# EAGLE board SandwichBoard (EAGLE 5.06)
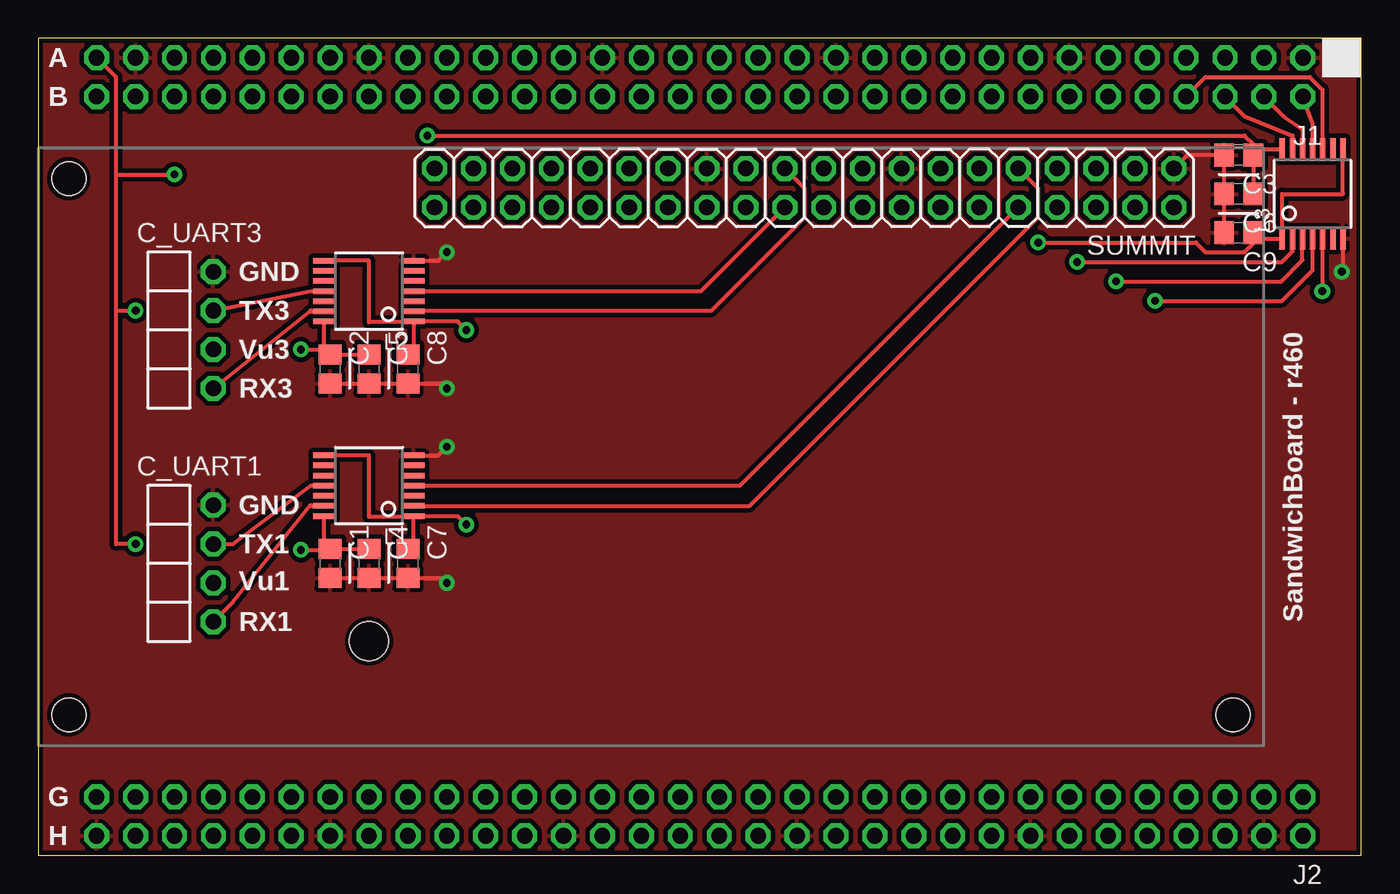
[diagram p0: board, top side]
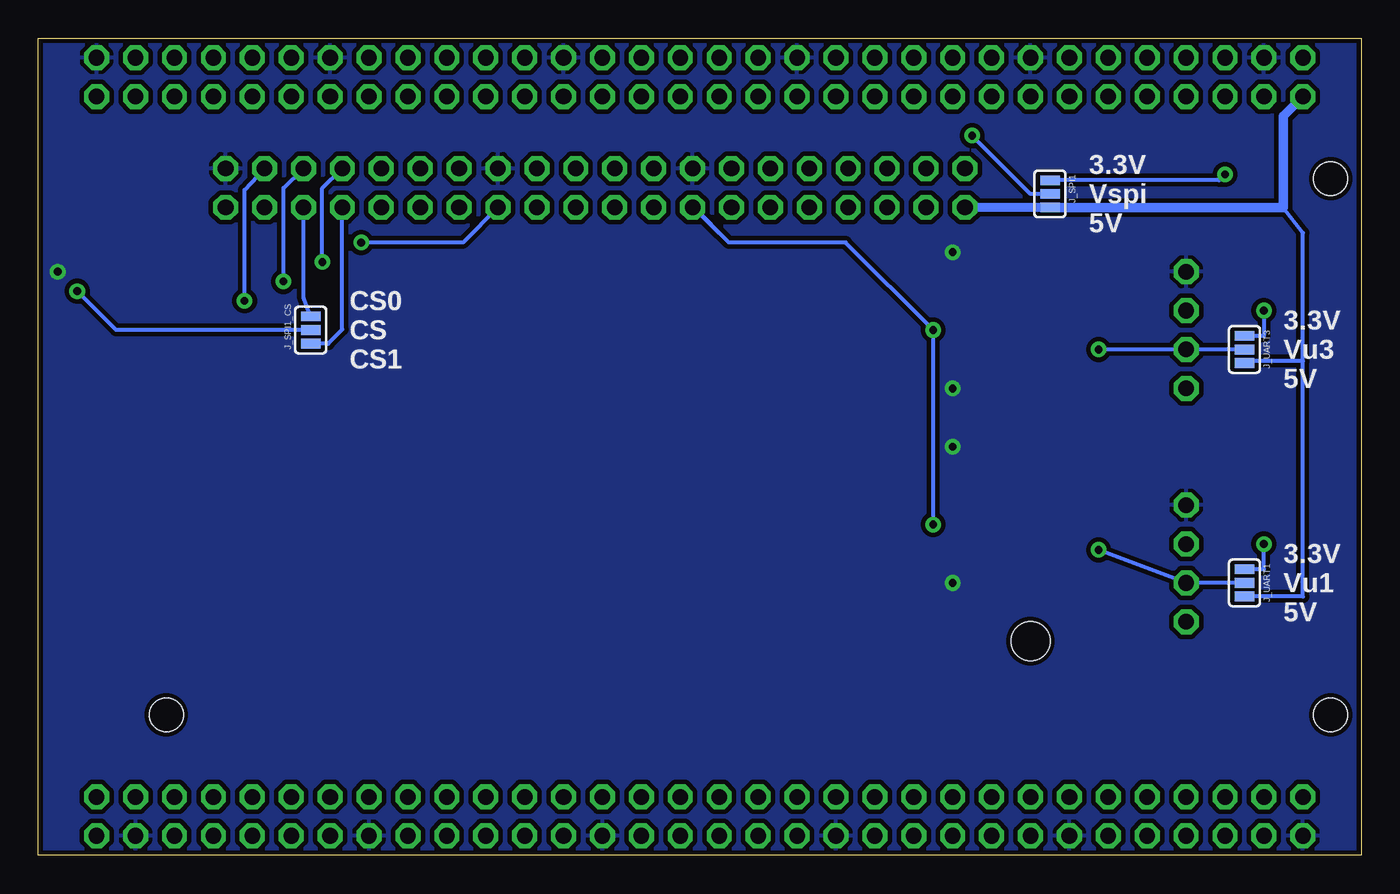
[diagram p1: board, bottom side, seen from below]

Size 86.36 x 53.34 mm. Coordinates in mm from the lower left corner, seen from the top.
Outline: 0,0 86.36,0 86.36,53.34 0,53.34 0,0
Copper layers (1*16): Top 0.035mm / dielectric 1.5mm / Bottom 0.035mm
Design rules "SparkFun": minimum track width 8mil, minimum drill 20mil, track to track 8mil, track to pad 8mil, pad to pad 8mil, via to via 8mil, smd to smd 8mil, copper to edge 10mil, drill to drill 8mil, minimum pad ring 12mil, minimum via ring 10mil, stop-mask expansion 4mil, vias tented up to drill 25mil, thermal gap 10mil
Holes 2.54 mm at 21.59,13.97

## Footprints (pad centres in the part's own frame; a part is rotated, then mirrored left to right if it is on the bottom)
C0805 = smd 1.3 x 1.5: 1 -0.95,0; 2 0.95,0
1X04/90 = drill 1.016 octagon: 1 -3.81,-0.01; 2 -1.27,-0.01; 3 1.27,-0.01; 4 3.81,-0.01
2X32/NOSILK = drill 1.016 octagon: 1 -39.37,-1.27; 2 -39.37,1.27; 3 -36.83,-1.27; 4 -36.83,1.27; 5 -34.29,-1.27; 6 -34.29,1.27; 7 -31.75,-1.27; 8 -31.75,1.27; 9 -29.21,-1.27; 10 -29.21,1.27; 11 -26.67,-1.27; 12 -26.67,1.27; 13 -24.13,-1.27; 14 -24.13,1.27; 15 -21.59,-1.27; 16 -21.59,1.27; 17 -19.05,-1.27; 18 -19.05,1.27; 19 -16.51,-1.27; 20 -16.51,1.27; 21 -13.97,-1.27; 22 -13.97,1.27; 23 -11.43,-1.27; 24 -11.43,1.27; 25 -8.89,-1.27; 26 -8.89,1.27; 27 -6.35,-1.27; 28 -6.35,1.27; 29 -3.81,-1.27; 30 -3.81,1.27; 31 -1.27,-1.27; 32 -1.27,1.27; 33 1.27,-1.27; 34 1.27,1.27; 35 3.81,-1.27; 36 3.81,1.27; 37 6.35,-1.27; 38 6.35,1.27; 39 8.89,-1.27; 40 8.89,1.27; 41 11.43,-1.27; 42 11.43,1.27; 43 13.97,-1.27; 44 13.97,1.27; 45 16.51,-1.27; 46 16.51,1.27; 47 19.05,-1.27; 48 19.05,1.27; 49 21.59,-1.27; 50 21.59,1.27; 51 24.13,-1.27; 52 24.13,1.27; 53 26.67,-1.27; 54 26.67,1.27; 55 29.21,-1.27; 56 29.21,1.27; 57 31.75,-1.27; 58 31.75,1.27; 59 34.29,-1.27; 60 34.29,1.27; 61 36.83,-1.27; 62 36.83,1.27; 63 39.37,-1.27; 64 39.37,1.27
SJ_3 = smd 0.635 x 1.27: 1 -0.889,0; 2 0,0; 3 0.889,0
TSSOP-14 = smd 1.422 x 0.356: 1 -2.921,1.981; 2 -2.921,1.321; 3 -2.921,0.66; 4 -2.921,0; 5 -2.921,-0.66; 6 -2.921,-1.321; 7 -2.921,-1.981; 8 2.921,-1.981; 9 2.921,-1.321; 10 2.921,-0.66; 11 2.921,0; 12 2.921,0.66; 13 2.921,1.321; 14 2.921,1.981
GUMSTIX_SUMMIT_SV1 = drill 1.016 octagon: 1 -34.13,-17.67; 2 -34.13,-15.13; 3 -31.59,-17.67; 4 -31.59,-15.13; 5 -29.05,-17.67; 6 -29.05,-15.13; 7 -26.51,-17.67; 8 -26.51,-15.13; 9 -23.97,-17.67; 10 -23.97,-15.13; 11 -21.43,-17.67; 12 -21.43,-15.13; 13 -18.89,-17.67; 14 -18.89,-15.13; 15 -16.35,-17.67; 16 -16.35,-15.13; 17 -13.81,-17.67; 18 -13.81,-15.13; 19 -11.27,-17.67; 20 -11.27,-15.13; 21 -8.73,-17.67; 22 -8.73,-15.13; 23 -6.19,-17.67; 24 -6.19,-15.13; 25 -3.65,-17.67; 26 -3.65,-15.13; 27 -1.11,-17.67; 28 -1.11,-15.13; 29 1.43,-17.67; 30 1.43,-15.13; 31 3.97,-17.67; 32 3.97,-15.13; 33 6.51,-17.67; 34 6.51,-15.13; 35 9.05,-17.67; 36 9.05,-15.13; 37 11.59,-17.67; 38 11.59,-15.13; 39 14.13,-17.67; 40 14.13,-15.13 | hole 2.2: 38,-17; 38,18; -38,18

## Placement (x,y rotation side)
C1  1uF  [C0805]  19.05,19.05 270 top
C2  1uF  [C0805]  19.05,31.75 270 top
C3  1uF  [C0805]  78.36,45.72 180 top
C4  0.1uF  [C0805]  21.59,19.05 270 top
C5  0.1uF  [C0805]  21.59,31.75 270 top
C6  0.1uF  [C0805]  78.36,43.18 180 top
C7  0.1uF  [C0805]  24.13,19.05 270 top
C8  0.1uF  [C0805]  24.13,31.75 270 top
C9  0.1uF  [C0805]  78.36,40.64 180 top
C_UART1  M04PTH90  [1X04/90]  11.43,19.05 270 top
C_UART3  M04PTH90  [1X04/90]  11.43,34.29 270 top
J1  CARDSTAC_FULL_STD_ROWS_AB_2X32_NOSILK  [2X32/NOSILK]  43.18,50.8 180 top
J2  CARDSTAC_FULL_STD_ROWS_GH_2X32_NOSILK  [2X32/NOSILK]  43.18,2.54 180 top
J_SPI1  JUMPER-3SMD  [SJ_3]  20.32,43.18 270 bottom
J_SPI1_CS  JUMPER-3SMD  [SJ_3]  68.58,34.29 90 bottom
J_UART1  JUMPER-3SMD  [SJ_3]  7.62,17.78 270 bottom
J_UART3  JUMPER-3SMD  [SJ_3]  7.62,33.02 270 bottom
L1  MAX3391EEUD+  [TSSOP-14]  21.59,24.13 180 top
L2  MAX3391EEUD+  [TSSOP-14]  21.59,36.83 180 top
L3  MAX3390EEUD+  [TSSOP-14]  83.19,43.18 90 top
SUMMIT  GUMSTIX_SUMMIT_SV1_2X20  [GUMSTIX_SUMMIT_SV1]  40,27.17 180 top

## Library data of the parts
C1-C9 C_UART1 C_UART3 J1 J2 J_SPI1 J_SPI1_CS J_UART1 J_UART3 L1-L3 SUMMIT = Robot

## Nets
3.3V: J1.63 J_SPI1.1 J_UART1.1 J_UART3.1
5V: J1.64 J_SPI1.3 J_UART1.3 J_UART3.3 SUMMIT.40
AGND: SUMMIT.37
DUMMY_3.3V: J2.2
DUMMY_AUX0: J2.1
DUMMY_AUX1: J2.3
GND: C1.2 C2.2 C3.2 C4.2 C5.2 C6.2 C7.2 C8.2 C9.2 C_UART1.1 C_UART3.1 J1.1 J1.13 J1.25 J1.37 J1.49 J1.61 J2.4 J2.16 J2.28 J2.40 J2.52 J2.64 L1.7 L2.7 L3.7 SUMMIT.1 SUMMIT.15 SUMMIT.25
RX1: L1.2 SUMMIT.9
RX3: L2.2 SUMMIT.21
SH-RX1: C_UART1.4 L1.13
SH-RX3: C_UART3.4 L2.13
SH-SPI1_CLK: J1.2 L3.11
SH-SPI1_CS: J1.8 L3.10
SH-SPI1_MISO: J1.6 L3.13
SH-SPI1_MOSI: J1.4 L3.12
SH-TX1: C_UART1.2 L1.11
SH-TX3: C_UART3.2 L2.11
SPI1_CLK: L3.4 SUMMIT.3
SPI1_CS: J_SPI1_CS.2 L3.5
SPI1_CS0: J_SPI1_CS.3 SUMMIT.6
SPI1_CS1: J_SPI1_CS.1 SUMMIT.8
SPI1_MISO: L3.2 SUMMIT.7
SPI1_MOSI: L3.3 SUMMIT.5
SPI_1.8V: C9.1 L3.1 L3.8 SUMMIT.16
TX1: L1.4 SUMMIT.10
TX3: L2.4 SUMMIT.22
UARTS_1.8V: C7.1 C8.1 L1.1 L1.8 L2.1 L2.8 SUMMIT.26
VAUX1_12V: J1.62
VBACKUP: SUMMIT.12
VCC-SPI1: C3.1 C6.1 J_SPI1.2 L3.14
VCC-UART1: C1.1 C4.1 C_UART1.3 J_UART1.2 L1.14
VCC-UART3: C2.1 C5.1 C_UART3.3 J_UART3.2 L2.14
VCC_3.3: SUMMIT.2

## Tracks (layer width: path | path; a pad name or v marks a point on that pad's centre or on a via)
3.3V  (via drill 0.51)
  Top 0.254: J1.63 5.08,50.8 5.08,44.45 | 5.08,35.56 5.08,20.32 v6.35,20.32 | 5.08,35.56 5.08,44.45 | 5.08,35.56 v6.35,35.56 | 5.08,44.45 v8.89,44.45
  Bottom 0.254: J_UART1.1 6.35,18.67 v6.35,20.32 | J_UART3.1 6.35,33.91 v6.35,35.56 | J_SPI1.1 9.27,44.07 v8.89,44.45
5V
  Bottom 0.254: 3.81,32.26 3.81,16.89 J_UART1.3 | 3.81,32.26 3.81,40.64 5.08,42.29 | J_UART3.3 7.62,32.26 3.81,32.26
  Bottom 0.61: J1.64 5.08,48.26 5.08,42.29 J_SPI1.3 SUMMIT.40
GND  (via drill 0.51)
  Top 0.254: C1.2 C4.2 C7.2 26.35,18.1 v26.67,17.78 | C2.2 C5.2 C8.2 26.35,30.8 v26.67,30.48 | L2.7 26.11,38.81 v26.67,39.37 | L1.7 26.11,26.11 v26.67,26.67 | C9.2 C6.2 C3.2 75.01,45.72 SUMMIT.1 | L3.7 85.17,38.18 v85.09,38.1
  pour Bottom (isolate 0.305): 0,0 0,53.34 86.36,53.34 86.36,0
  pour Top (isolate 0.305): 0,0 0,53.34 86.36,53.34 86.36,0
RX1
  Top 0.254: L1.2 46.43,22.81 65.28,41.66 65.28,43.53 SUMMIT.9
RX3
  Top 0.254: L2.2 24.56,35.56 43.94,35.56 50.04,41.66 50.04,43.53 SUMMIT.21
SH-RX1
  Top 0.254: L1.13 17.73,22.81 17.78,22.86 12.7,16.52 C_UART1.4
SH-RX3
  Top 0.254: L2.13 17.72,35.51 17.78,35.57 C_UART3.4
SH-SPI1_CLK
  Top 0.254: L3.11 83.19,47.75 J1.2
SH-SPI1_CS
  Top 0.254: J1.8 76.2,50.8 83.01,50.8 83.82,49.99 83.82,46.99 L3.10
SH-SPI1_MISO
  Top 0.254: J1.6 78.74,48.26 81.86,46.99 L3.13
SH-SPI1_MOSI
  Top 0.254: L3.12 82.53,47.4 81.28,48.26 J1.4
SH-TX1
  Top 0.254: L1.11 17.78,24.13 12.7,20.32 C_UART1.2
SH-TX3
  Top 0.254: L2.11 17.78,36.83 C_UART3.2
SPI1_CLK  (via drill 0.51)
  Top 0.254: v72.9,36.2 81.18,36.2 83.19,38.2 L3.4
  Bottom 0.254: v72.9,36.2 72.9,43.43 SUMMIT.3
SPI1_CS  (via drill 0.51)
  Top 0.254: L3.5 83.84,36.85 v83.82,36.83
  Bottom 0.254: J_SPI1_CS.2 81.28,34.29 v83.82,36.83
SPI1_CS0
  Bottom 0.254: SUMMIT.6 69.05,36.41 J_SPI1_CS.3
SPI1_CS1
  Bottom 0.254: J_SPI1_CS.1 67.44,33.4 66.51,34.33 SUMMIT.8
SPI1_MISO  (via drill 0.51)
  Top 0.254: v67.82,38.73 81.18,38.73 81.86,39.42 L3.2
  Bottom 0.254: v67.82,38.73 67.82,43.56 SUMMIT.7
SPI1_MOSI  (via drill 0.51)
  Top 0.254: v70.36,37.47 81.13,37.47 82.53,38.86 L3.3
  Bottom 0.254: v70.36,37.47 70.36,43.56 SUMMIT.5
SPI_1.8V  (via drill 0.51)
  Top 0.254: L3.8 85.17,43.18 81.2,43.18 L3.1 79.31,40.26 C9.1 79.31,39.94 78.74,39.37 76.2,39.37 75.56,40.01 v65.28,40.01
  Bottom 0.254: v65.28,40.01 58.65,40.01 SUMMIT.16
TX1
  Top 0.254: L1.4 45.8,24.13 SUMMIT.10
TX3
  Top 0.254: L2.4 43.26,36.83 SUMMIT.22
UARTS_1.8V  (via drill 0.51)
  Top 0.254: 24.51,22.1 24.51,20.07 24.45,20 C7.1 | 24.51,22.1 L1.1 27.38,22.15 v27.94,21.59 | L1.8 21.59,26.11 21.59,22.1 24.51,22.1 | L2.8 21.59,38.81 21.59,34.8 24.51,34.8 L2.1 | L2.1 24.51,32.64 C8.1 | L2.1 27.38,34.85 v27.94,34.29
  Bottom 0.254: v27.94,21.59 v27.94,34.29 33.66,40.01 41.27,40.01 | 41.27,40.01 SUMMIT.26 43.57,42.3 41.27,40.01
VCC-SPI1  (via drill 0.51)
  Top 0.254: 79.31,46.1 L3.14 | 79.31,46.1 C3.1 C6.1 | 79.31,46.1 79.31,46.42 78.74,46.99 v25.4,46.99
  Bottom 0.254: J_SPI1.2 21.59,43.18 v25.4,46.99
VCC-UART1  (via drill 0.51)
  Top 0.254: C4.1 C1.1 19.05,20.32 18.67,20.32 | 18.67,20.32 L1.14 | 18.67,20.32 18.67,19.94 v17.14,19.94
  Bottom 0.254: v17.14,19.94 C_UART1.3 J_UART1.2
VCC-UART3  (via drill 0.51)
  Top 0.254: C5.1 C2.1 19.05,33.02 18.67,33.02 | 18.34,34.85 L2.14 18.67,33.02 | v17.14,33.02 18.67,33.02
  Bottom 0.254: v17.14,33.02 C_UART3.3 J_UART3.2

## Text on the board
tPlace: A | B | GND | TX3 | Vu3 | RX3 | GND | TX1 | Vu1 | RX1 | SandwichBoard - r460 | G | H
bPlace: 3.3V | Vspi | 5V | CS0 | 3.3V | CS | Vu3 | CS1 | 5V | 3.3V | Vu1 | 5V